# Altium PCB Adapterboard BLE-cube.PcbDoc
Units mil, origin at the board's own origin, x right, y up, seen from the top; angles counter-clockwise.
Board outline 1737.33 x 1974.23 mil, 2 copper layers (Top Layer, Bottom Layer); 10 components, 7 nets, 53 pads, 0 vias.
Unrouted connection lines stored in the file: 3.
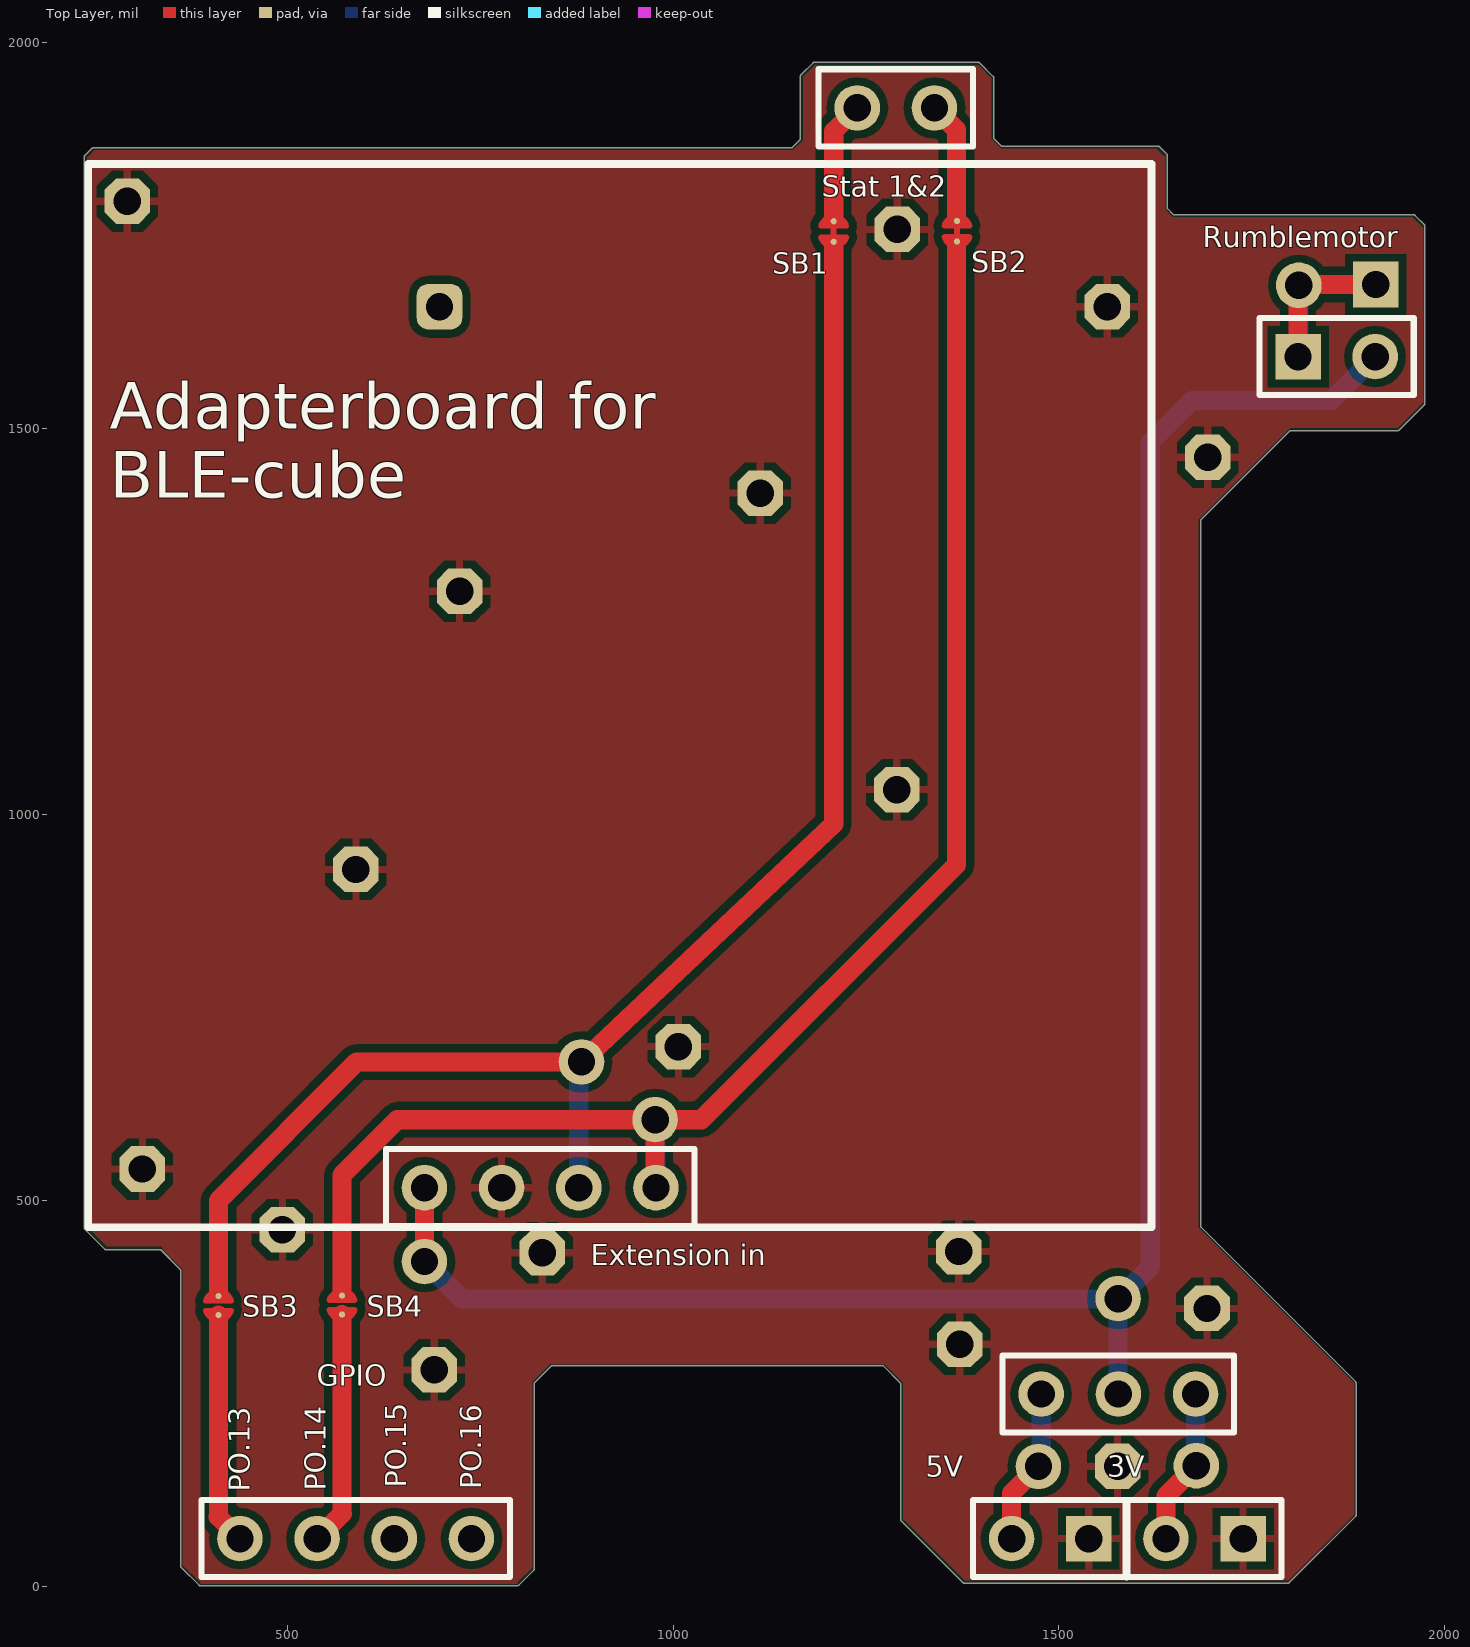
[diagram p0: Top Layer view]
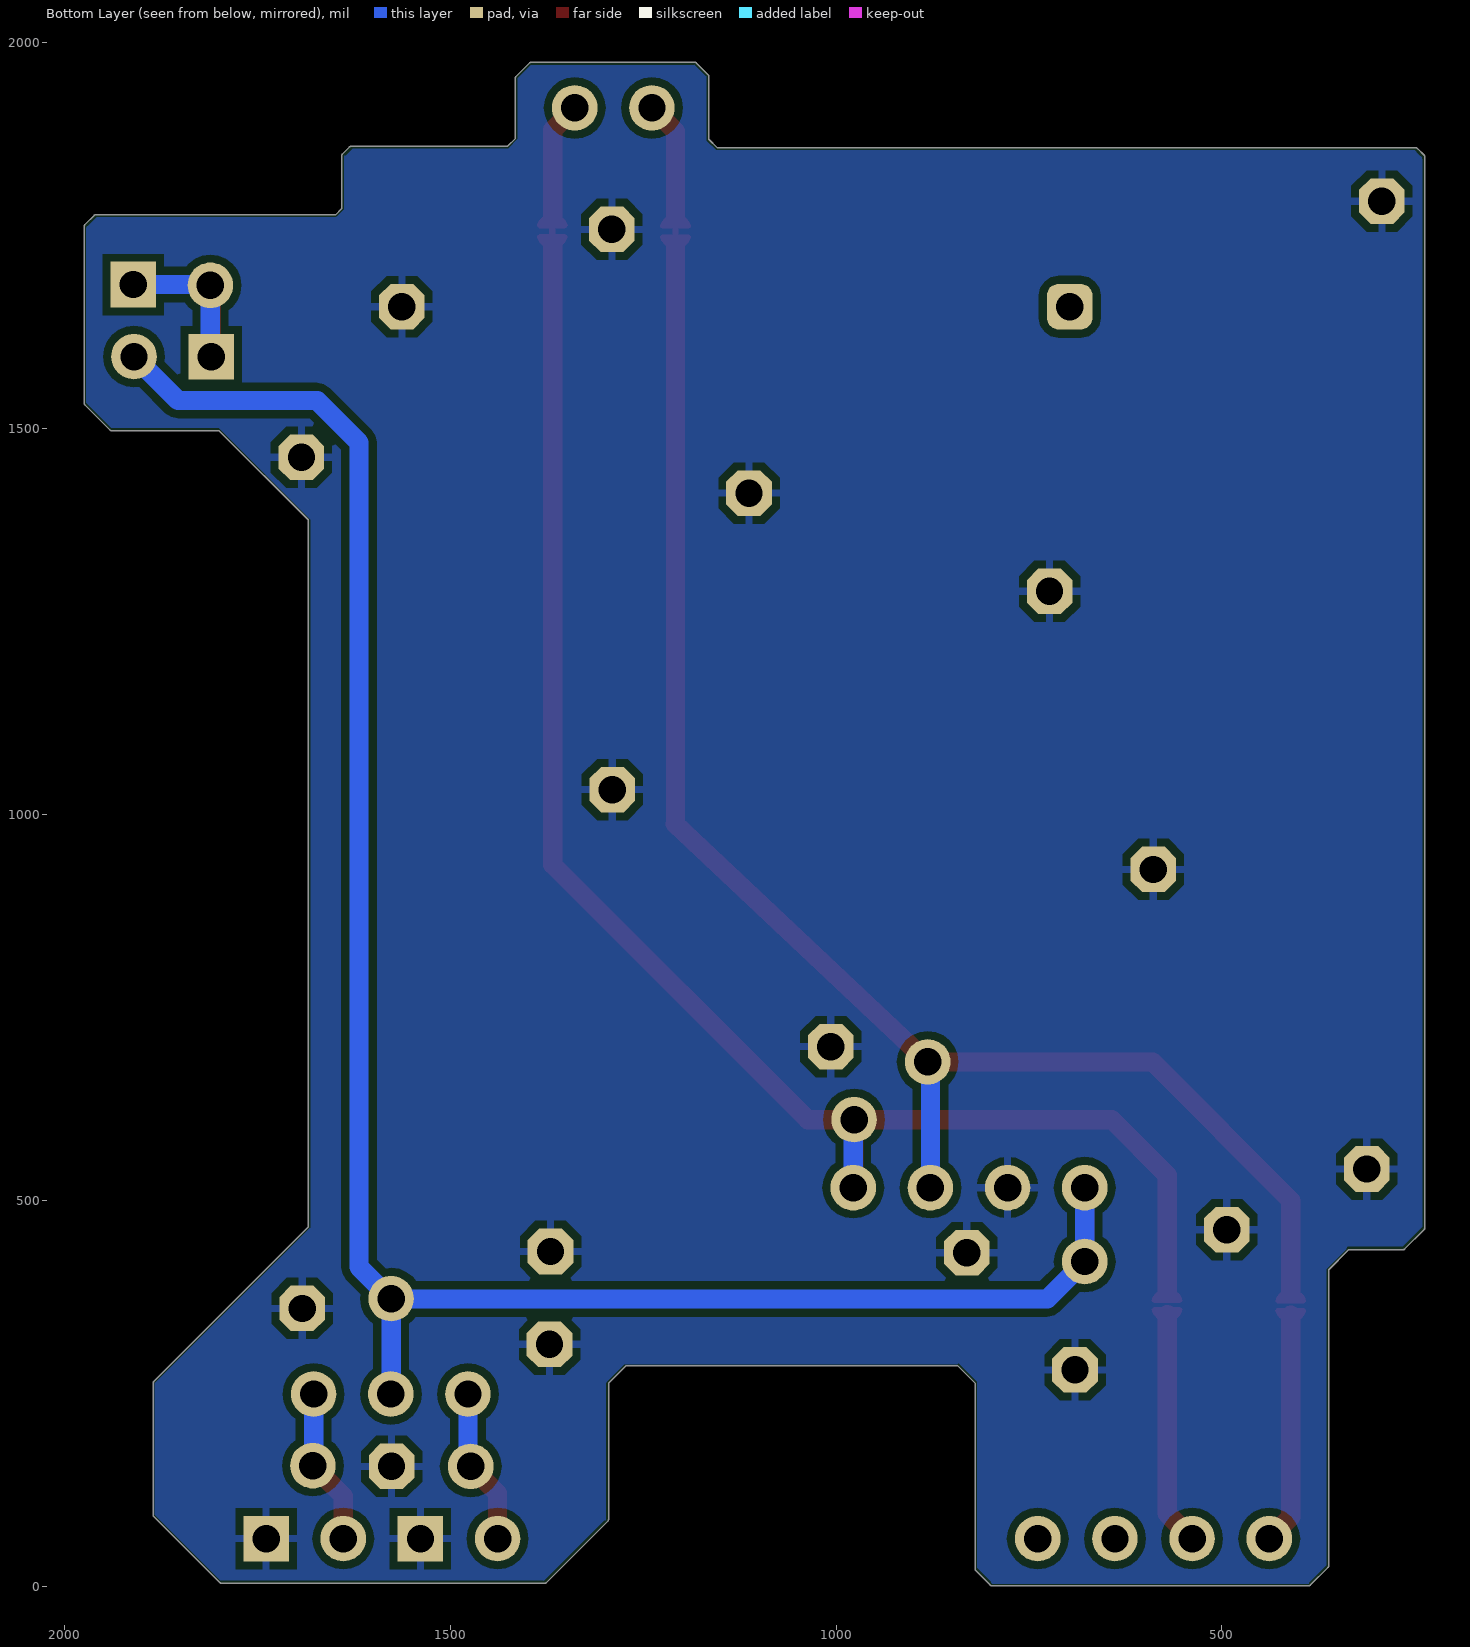
[diagram p1: Bottom Layer view, seen from below]

## Layer stack, top to bottom
Top Solder: solder mask 0.4, Solder Resist, Dk 3.5
Top Layer: signal copper 1.4
Dielectric 1: dielectric 12.6, FR-4, Dk 4.8
Bottom Layer: signal copper 1.4
Bottom Solder: solder mask 0.4, Solder Resist, Dk 3.5

## Board outline
387.6,0.39 797.5,0.39 ccw(c797.5,3.4) 797.85,0.41 ccw(c798.2,3.4) 800.33,1.27 819.13,20.07 819.12,20.06 ccw(c817,22.2) 820.01,22.2 820.01,263.05 842.15,285.19 1272.55,285.19 1294.88,262.85 1294.88,86.3 ccw(c1297.9,86.3) 1295.78,84.16 1295.77,84.17 1375.47,4.47 1375.46,4.48 ccw(c1377.6,6.6) 1377.6,3.58 1796.5,3.58 ccw(c1796.5,6.6) 1798.64,4.48 1798.63,4.47 1884.23,90.07 1884.22,90.06 ccw(c1882.1,92.2) 1885.12,92.2 1885.12,262.8 ccw(c1882.1,262.8) 1884.22,264.94 1884.23,264.93 1684.02,465.15 1684.02,1381.65 1799.55,1497.18 1938.8,1497.18 ccw(c1938.8,1500.2) 1940.94,1498.08 1940.93,1498.07 1973.43,1530.57 1973.42,1530.56 ccw(c1971.3,1532.7) 1974.32,1532.7 1974.32,1762.2 ccw(c1971.3,1762.2) 1973.42,1764.34 1973.43,1764.33 1961.53,1776.23 1961.54,1776.22 ccw(c1959.4,1774.1) 1959.4,1777.12 1650.4,1777.12 ccw(c1650.4,1774.1) 1648.93,1776.73 1640.71,1784.95 1640.71,1853.6 ccw(c1637.7,1853.6) 1639.82,1855.74 1639.83,1855.73 1630.73,1864.83 1630.74,1864.82 ccw(c1628.6,1862.7) 1628.6,1865.71 1425.75,1865.71 1415.62,1875.85 1415.62,1954.2 ccw(c1412.6,1954.2) 1414.72,1956.34 1414.73,1956.33 1397.33,1973.73 1397.34,1973.72 ccw(c1395.2,1971.6) 1395.2,1974.62 1183.3,1974.62 ccw(c1183.3,1971.6) 1181.16,1973.72 1181.17,1973.73 1165.87,1958.43 1165.88,1958.44 ccw(c1168,1956.3) 1164.98,1956.3 1164.98,1874.95 1153.75,1863.71 248.8,1863.71 ccw(c248.8,1860.7) 246.66,1862.82 246.67,1862.83 237.87,1854.03 237.88,1854.04 ccw(c240,1851.9) 236.99,1851.9 236.99,464.2 ccw(c240,464.2) 237.88,462.06 237.87,462.07 263.37,436.57 263.36,436.58 ccw(c265.5,438.7) 265.5,435.69 335.95,435.69 361.69,409.95 361.69,26.3 ccw(c364.7,26.3) 362.58,24.16 362.57,24.17 385.47,1.27 385.46,1.28 ccw(c387.6,3.4)

## Design rules (kind name [scope] priority, off if disabled: settings)
Clearance [All] p1: gap=10
PolygonConnect [All] p1: connectstyle=Relief reliefconductorwidth=10 reliefentries=4 polygonreliefangle="90 Angle" airgapwidth=10
RoutingVias [All] p1: holewidth=28 width=50 viastyle="Through Hole" minholewidth=28 minwidth=50 maxholewidth=28 maxwidth=50
SolderMaskExpansion [All] p1: expansion=4
Width [All] p1: maxlimit=32 minlimit=10 preferedwidth=30 minimp=50.000000 maximp=50.000000 favimp=50.000000
30 further rules are at their usual default settings.

## Components (designator, comment, footprint, x,y, rotation, side; value= is the part's Value field where it differs from the comment)
"5V                3V" "Comment" HDR1X4#1 1438.7,61.43 r0 top
"Extension in" "Comment" HDR1X4#2 677.8,516.2 r0 top
GPIO "Comment" HDR1X4#2 438.7,61.43 r0 top
Rumblemotor "Header 2" HDR1X2#1 1909.9,1593.2 r180 top (schematic designator P4)
SB1 "Solderbridge" Solderbridge_Shorted#1 1208.1,1768.6 r270 top net-tie (schematic designator SB24)
SB2 "Solderbridge" Solderbridge_Shorted#2 1367.9,1769 r270 top net-tie (schematic designator SB24)
SB3 "Solderbridge" Solderbridge 410.9,375.6 r270 top (schematic designator SB11)
SB4 "Solderbridge" Solderbridge 571.04,376.38 r270 top (schematic designator SB11)
"Stat 1&2" "Header 2" HDR1X2#2 1338.7,1915.54 r180 top (schematic designator P4)
? "Comment" HDR1X3 1477.1,248.8 r0 top

## Footprints (in the part's own frame and the unit in brackets; to place one, negate y for a bottom-side part, rotate by r counter-clockwise, add the part's x,y. Pads: shape width x height; smd on the part's side, far side on the other; paste and mask are expansions set on the pad)
HDR1X2#1 [mm] "Connector; Header; 2 Position"
  round 1.5 hole 0.9: 1(0,0)
  rect 1.5x1.5 hole 0.9: 2(2.54,0)
  silkscreen extent -1.27,-1.27 3.81,1.27
HDR1X2#2 [mm] "Connector; Header; 2 Position"
  round 1.5 hole 0.9: 1(0,0) 2(2.54,0)
  silkscreen extent -1.27,-1.27 3.81,1.27
HDR1X3 [mm] "Connector; Header; 3 Position"
  round 1.5 hole 0.9: 1(0,0) 2(2.54,0) 3(5.08,0)
  silkscreen extent -1.27,-1.27 6.35,1.27
HDR1X4#1 [mm] "Connector; Header; 4 Position"
  round 1.5 hole 0.9: 1(0,0) 3(5.08,0)
  rect 1.5x1.5 hole 0.9: 2(2.54,0) 4(7.62,0)
  silkscreen extent -1.27,-1.27 8.89,1.27
HDR1X4#2 [mm] "Connector; Header; 4 Position"
  round 1.5 hole 0.9: 1(0,0) 2(2.54,0) 3(5.08,0) 4(7.62,0)
  silkscreen extent -1.27,-1.27 8.89,1.27
Solderbridge [mm]
  round 0.2 smd paste-10: 1(0,0) 2(0.625,0)
  Top Layer region: 0.236,-0.432 0.16,-0.505 0.042,-0.467 -0.023,-0.424 -0.097,-0.351 -0.15,-0.292 -0.208,-0.193 -0.236,-0.099 -0.231,0.122 -0.206,0.193 -0.122,0.33 -0.038,0.411 0.054,0.469 0.155,0.5 0.206,0.483 0.236,0.43
  Top Layer region: 0.389,0.432 0.465,0.505 0.583,0.467 0.648,0.424 0.721,0.351 0.775,0.292 0.833,0.193 0.861,0.099 0.856,-0.122 0.831,-0.193 0.747,-0.33 0.663,-0.411 0.571,-0.469 0.47,-0.5 0.419,-0.483 0.389,-0.43
  Top Layer lines w0.152: 0.465,-0.431 ccw(c0.355,0) 0.465,0.431 ; 0.159,-0.431 cw(c0.27,0) 0.159,0.431
Solderbridge_Shorted#1 [mm]
  round 0.2 smd paste-10: 1(0,0) 2(0.676,0)
  Top Layer region: 0.44,0.432 0.516,0.505 0.634,0.467 0.698,0.424 0.772,0.351 0.826,0.292 0.884,0.193 0.912,0.099 0.907,-0.122 0.881,-0.193 0.798,-0.33 0.714,-0.411 0.622,-0.469 0.521,-0.5 0.47,-0.483 0.44,-0.43
  Top Layer region: 0.236,-0.432 0.16,-0.505 0.042,-0.467 -0.023,-0.424 -0.097,-0.351 -0.15,-0.292 -0.208,-0.193 -0.236,-0.099 -0.231,0.122 -0.206,0.193 -0.122,0.33 -0.038,0.411 0.054,0.469 0.155,0.5 0.206,0.483 0.236,0.43
  Top Layer lines w0.152: 0.516,-0.431 ccw(c0.406,0) 0.516,0.431 ; 0.159,-0.431 cw(c0.27,0) 0.159,0.431
  Top Layer lines w0.203: 0.676,0 0,0
Solderbridge_Shorted#2 [mm]
  round 0.2 smd paste-10: 1(0,0) 2(0.676,0)
  Top Layer region: 0.44,0.432 0.516,0.505 0.634,0.467 0.698,0.424 0.772,0.351 0.826,0.292 0.884,0.193 0.912,0.099 0.907,-0.122 0.881,-0.193 0.798,-0.33 0.714,-0.411 0.622,-0.469 0.521,-0.5 0.47,-0.483 0.44,-0.43
  Top Layer region: 0.236,-0.432 0.16,-0.505 0.042,-0.467 -0.023,-0.424 -0.097,-0.351 -0.15,-0.292 -0.208,-0.193 -0.236,-0.099 -0.231,0.122 -0.206,0.193 -0.122,0.33 -0.038,0.411 0.054,0.469 0.155,0.5 0.206,0.483 0.236,0.43
  Top Layer lines w0.152: 0.516,-0.431 ccw(c0.406,0) 0.85,-0.018 ccw(c0.406,0) 0.516,0.431 ; 0.159,-0.431 cw(c0.27,0) -0.174,-0.018 cw(c0.27,0) 0.159,0.431
  Top Layer lines w0.203: 0.676,0 0,0

## Part data
"5V                3V" "Extension in" GPIO: library part "Header 4"
Rumblemotor "Stat 1&2": "Header, 2-Pin"
SB1 SB2: library part "Solderbridge Shorted", "Shorted Solderbridge"
?: library part "Header 3"

## Free pads (board coordinates)
  oct 59.05x59.05 hole 35.43: 0(292.7,1794.6) 0(312.3,540.4) 0(493.7,461.7) 0(589,928.6) 0(690.4,280.1) 0(723.4,1289.1) 0(830.6,432) 0(1006.9,699) 0(1112.9,1416.3) 0(1290,1032.1) 0(1290.6,1758.1) 0(1370.1,433.5) 0(1371.4,313.2) 0(1562.7,1657.9) 0(1576.1,155) 0(1691.9,359.7) 0(1692.9,1462.7)
  round 59.05 hole 35.43: 0(677.8,420.5) 0(881.3,679.2) 0(976.7,604.4) 0(1473.5,155) 0(1576.7,372.4) 0(1678.1,155.9) 0(1810.9,1685.6)
  rrect50% 59.05x59.05 hole 35.43: 0(697.3,1657.9)
  rect 59.05x59.05 hole 35.43: 0(1910.7,1686.6)

## Nets (pads, with @x,y where several pads share a name; then routed paths per layer and width w, separated by ;. In a path a pad name is that pad's centre, name@x,y a point inside that pad or via, vN(x,y) a via of type N, cw(c..) or ccw(c..) an arc to the next point about the centre after c; other vN are vias at no path point)
"4.2V to 3V rail": "5V                3V.3" ?.3 pad.0@1678.1,155.9 | length 202.7
  Top Layer w25: 1638.7,61.43 1638.7,116.5 pad.0@1678.1,155.9
  Bottom Layer w25: pad.0@1677.1,156.9 ?.3
"4.2V to 5V rail": "5V                3V.1" ?.1 pad.0@1473.5,155 | length 203.3
  Top Layer w25: 1438.7,61.43 1438.7,120.2 pad.0@1473.5,155
  Bottom Layer w25: pad.0@1473.5,155 1477.1,158.6 ?.1
GND: "5V                3V.2" "5V                3V.4" "Extension in.2" pad.0@292.7,1794.6 pad.0@312.3,540.4 pad.0@493.7,461.7 pad.0@589,928.6 pad.0@690.4,280.1 pad.0@723.4,1289.1 pad.0@830.6,432 pad.0@1006.9,699 pad.0@1112.9,1416.3 pad.0@1290,1032.1 pad.0@1290.6,1758.1 pad.0@1370.1,433.5 pad.0@1371.4,313.2 pad.0@1562.7,1657.9 pad.0@1576.1,155 pad.0@1691.9,359.7 pad.0@1692.9,1462.7
"Load (4.2V)": "Extension in.1" ?.2 pad.0@677.8,420.5 pad.0@1576.7,372.4 Rumblemotor.1 | length 2699.2
  Top Layer w25: pad.0@677.8,420.5 677.8,516.2
  Bottom Layer w25: 677.8,516.2 677.8,420.5 726.3,372 pad.0@1576.7,372 ; pad.0@1576.7,372.4 pad.0@1576.7,372 ; ?.2 1576.7,249.2 pad.0@1576.7,372 ; Rumblemotor.1 1852.9,1536.2 1672.6,1536.2 1618.4,1482 1618.4,413.4 1577,372 pad.0@1576.7,372
"Rumble Drain": pad.0@1810.9,1685.6 pad.0@1910.7,1686.6 Rumblemotor.2 | length 384.6
  Top Layer w25: Rumblemotor.2 pad.0@1809.9,1684.6 ; pad.0@1810.9,1685.6 1811.9,1686.6 pad.0@1910.7,1686.6
  Bottom Layer w25: Rumblemotor.2 1810.9,1594.2 1810.9,1685.6 1811.9,1686.6 pad.0@1910.7,1686.6
Stat1: "Extension in.4" "Stat 1&2.1" GPIO.2 pad.0@976.7,604.4 SB2.1 SB2.2 SB4.1 SB4.2 | length 2550.4
  Top Layer w25: GPIO.2 571.2,93.93 ; 571.04,94.09 SB4.2 ; 571.04,381.2 571.04,532.74 642.7,604.4 pad.0@976.7,604.4 ; 977.8,516.2 976.7,517.3 pad.0@976.7,604.4 ; 1338.7,1915.54 1367.2,1887.04 1367.2,1774.3 ; 1367.2,1736.9 1367.2,934.7 1036.9,604.4 pad.0@976.7,604.4
  Bottom Layer w25: pad.0@976.7,604.4 977.8,603.3 977.8,516.2
Stat2: "Extension in.3" "Stat 1&2.2" GPIO.1 pad.0@881.3,679.2 SB1.1 SB1.2 SB3.1 SB3.2 | length 2481.1
  Top Layer w25: 410.5,89.63 GPIO.1 ; 410.9,90.03 SB3.2 ; 410.9,380.3 410.9,499.6 589.7,679.2 881.3,679.2 1208.29,987.59 ; 1208.1,987.8 1208.1,1736.5 ; 1208.1,1773.5 1208.1,1884.94 ; 1208.3,1885.14 1238.7,1915.54
  Bottom Layer w25: 877.8,516.2 877.8,656.5 pad.0@881.3,679.2
pads on no net: GPIO.3 GPIO.4

## Polygon pours and split planes (outlines as drawn)
GND on Top Layer "GND_L01_P007" (solid, pour order 7): 240.3,1852.5 242.1,1852.5 250,1860.4 1155.3,1860.4 1156,1861.1 1168.1,1873.2 1168.4,1873.2 1168.4,1956.6 1169.1,1956.6 1184,1971.5 1184.7,1970.8 1394.3,1970.8 1396,1970.8 1412.3,1954.5 1412.6,1954.2 1412.6,1875.3 1425.1,1862.8 1425.1,1862.5 1626.4,1862.5 1635.4,1853.5 1637.1,1853.5 1637.5,1853.1 1637.5,1784 1646.9,1774.6 1647.9,1774.6 1648.6,1773.9 1958.2,1773.9 1969.9,1762.2 1970.3,1762.2 1972,1760.5 1972,1533.5 1971.6,1533.5 1939.1,1501 1800.1,1501 1799.7,1500.6 1681.1,1382 1680.7,1381.6 1680.7,463.5 1681.9,463.5 1882.8,262.6 1882.8,92.4 1882.4,92 1798,7.6 1797,7.6 1379.4,7.6 1378.7,6.9 1300.5,85.1 1298.5,85.1 1298.5,262.9 1297.8,263.6 1297.8,263.9 1274.6,287.1 843,287.1 841.2,288.9 817.3,265 817.3,23.6 816.9,23.2 799,5.3 799,4.2 797.9,3.1 387.6,3.1 387.6,4.2 366.2,25.6 364.8,27 364.8,28 364.8,410.6 338.9,436.5 338.9,437.9 336.8,440 265.9,440 240.6,465.3 240.6,465.6 240.6,1850.7 241,1851.1 241,1854 240.9,1854.1
GND on Bottom Layer "GND_L02_P009" (solid, pour order 9): 240.3,1852.5 242.1,1852.5 250,1860.4 1155.3,1860.4 1156,1861.1 1168.1,1873.2 1168.4,1873.2 1168.4,1956.6 1169.1,1956.6 1184,1971.5 1184.7,1970.8 1394.3,1970.8 1396,1970.8 1412.3,1954.5 1412.6,1954.2 1412.6,1875.3 1425.1,1862.8 1425.1,1862.5 1626.4,1862.5 1635.4,1853.5 1637.1,1853.5 1637.5,1853.1 1637.5,1784 1646.9,1774.6 1647.9,1774.6 1648.6,1773.9 1958.2,1773.9 1969.9,1762.2 1970.3,1762.2 1972,1760.5 1972,1533.5 1971.6,1533.5 1939.1,1501 1800.1,1501 1799.7,1500.6 1681.1,1382 1680.7,1381.6 1680.7,463.5 1681.9,463.5 1882.8,262.6 1882.8,92.4 1882.4,92 1798,7.6 1797,7.6 1379.4,7.6 1378.7,6.9 1300.5,85.1 1298.5,85.1 1298.5,262.9 1297.8,263.6 1297.8,263.9 1274.6,287.1 843,287.1 841.2,288.9 817.3,265 817.3,23.6 816.9,23.2 799,5.3 799,4.2 797.9,3.1 387.6,3.1 387.6,4.2 366.2,25.6 364.8,27 364.8,28 364.8,410.6 338.9,436.5 338.9,437.9 336.8,440 265.9,440 240.6,465.3 240.6,465.6 240.6,1850.7 241,1851.1 241,1854 240.9,1854.1

## Silkscreen, mask and mechanical layers (free items; w line width, h text height)
Top Overlay:
  lines w10: 242.05,464.9 1620,464.9 1620,1842.85 242.05,1842.85 ; 242.15,464.9 242.15,1842.85 ; 1587.7,12.3 1587.7,110.3 1587.7,65.3
  text "Adapterboard for / BLE-cube" at 269.8,1410 h60
  text "PO.15" at 654.16,127.36 h27 r90
  text "PO.16" at 751.26,125.56 h27 r90
  text "PO.14" at 550.06,123.76 h27 r90
  text "PO.13" at 451.36,122.16 h27 r90
Mechanical 1:
  lines w6: 240.2,464.2 265.7,438.7 337.4,438.7 364.9,411.2 364.9,26.3 387.8,3.4 797.7,3.4 798.4,3.4 817.2,22.2 817.2,264.3 841.1,288.2 1274,288.2 1298.1,264.1 1298.1,86.3 1377.8,6.6 1796.7,6.6 1882.3,92.2 1882.3,262.8 1681.2,463.9 1681.2,1382.9 1798.5,1500.2 1939,1500.2 1971.5,1532.7 1971.5,1762.2 1959.6,1774.1 1650.6,1774.1 1647.5,1774.1 1637.9,1783.7 1637.9,1853.6 1628.8,1862.7 1424.7,1862.7 1412.8,1874.6 1412.8,1954.2 1395.4,1971.6 1183.5,1971.6 1168.2,1956.3 1168.2,1873.7 1155.2,1860.7 249,1860.7 240.2,1851.9 240.2,464.2